# EAGLE board Task (EAGLE 8.2.1)
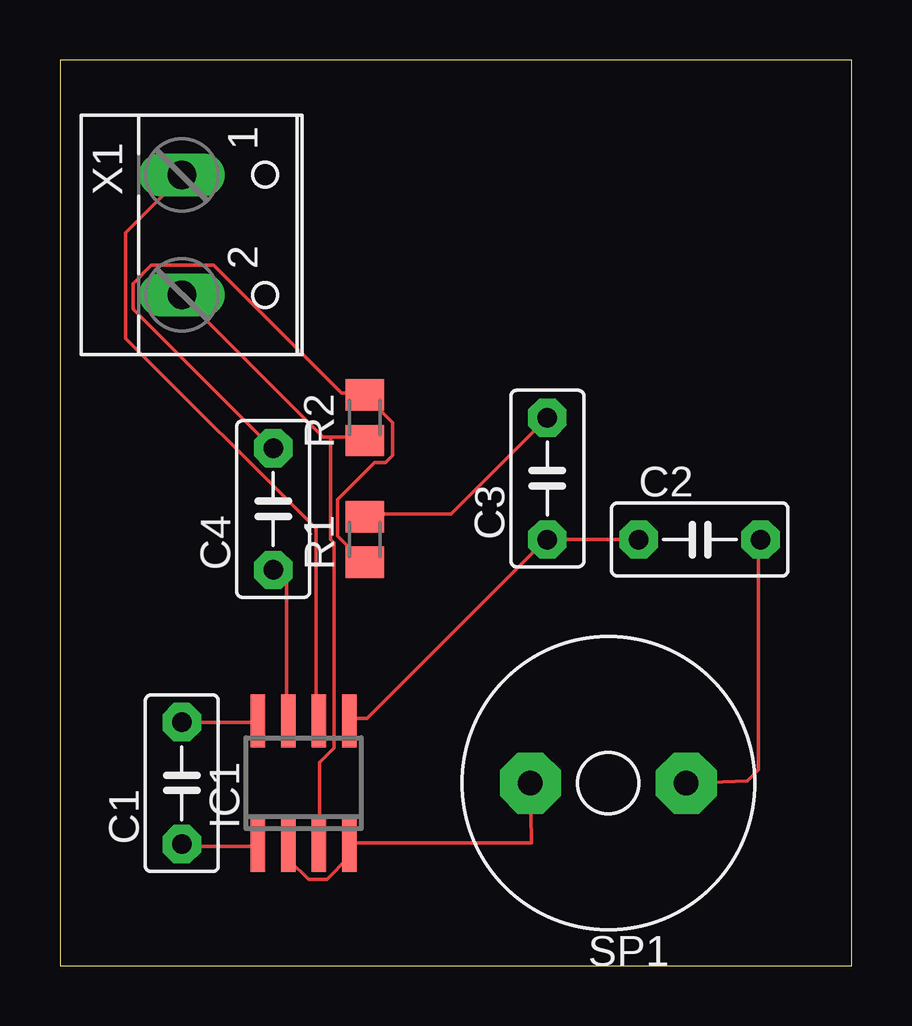
[diagram p0: board, top side]
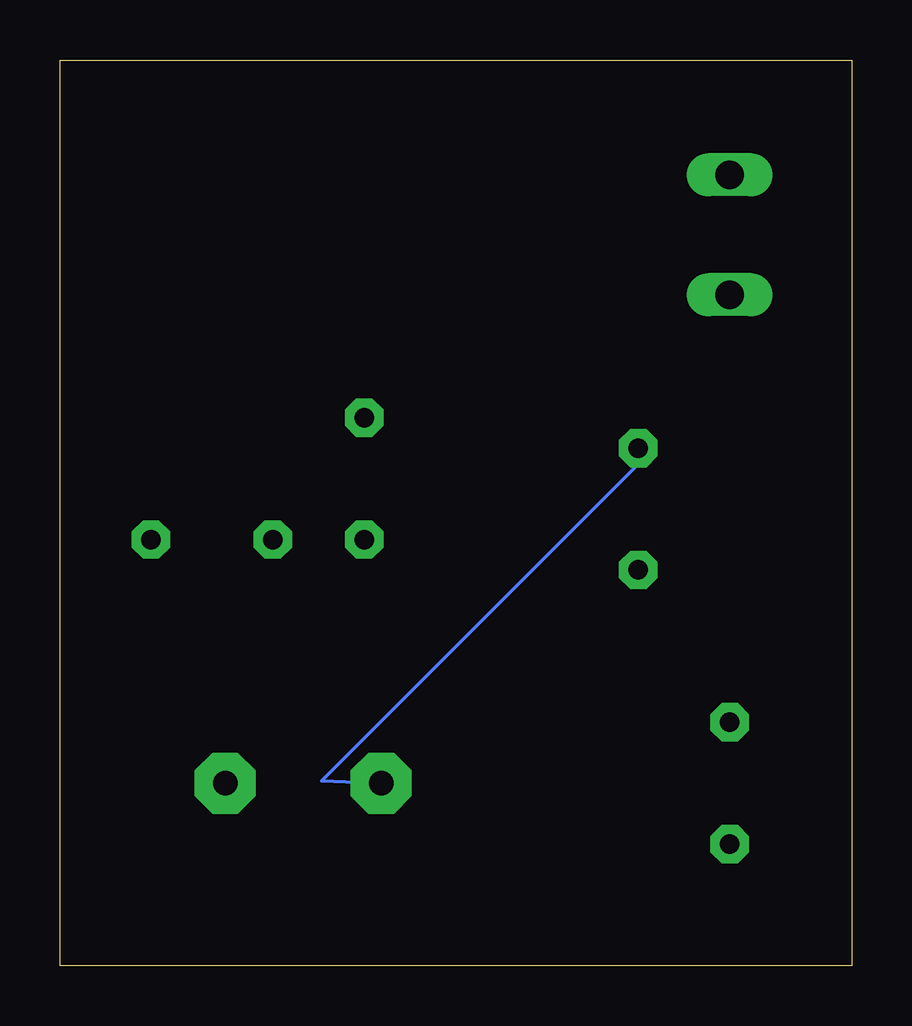
[diagram p1: board, bottom side, seen from below]

Size 33 x 37.77 mm. Coordinates in mm from the lower left corner, seen from the top.
Outline: 0,0 33,0 33,37.77 0,37.77 0,0
Copper layers (1*16): Top 0.035mm / dielectric 1.5mm / Bottom 0.035mm
Design rules "default": minimum track width 6mil, minimum drill 0.35mm, track to track 6mil, track to pad 6mil, pad to pad 6mil, via to via 6mil, smd to smd 6mil, copper to edge 40mil, drill to drill 6mil, minimum pad ring 10mil, minimum via ring 8mil, stop-mask expansion 4mil, vias tented up to drill 0mil, thermal gap 10mil

## Footprints (pad centres in the part's own frame; a part is rotated, then mirrored left to right if it is on the bottom)
C5B3 = drill 0.813 pad 1.6 octagon: 1 -2.54,0; 2 2.54,0
SO08 = smd 0.6 x 2.2: 1 -1.905,-2.6; 2 -0.635,-2.6; 3 0.635,-2.6; 4 1.905,-2.6; 5 1.905,2.6; 6 0.635,2.6; 7 -0.635,2.6; 8 -1.905,2.6
M0805 = smd 1.3 x 1.6: 1 -0.95,0; 2 0.95,0
AL60P = drill 1.016 pad 2.54 octagon: 1 -3.251,0; 2 3.251,0
W237-102 = drill 1.194 long: 1 -2.5,-1.27; 2 2.5,-1.27

## Placement (x,y rotation side)
C1  10 uF  [C5B3]  5.08,7.62 90 top
C2  250 uF  [C5B3]  26.67,17.78 0 top
C3  0.05 uF  [C5B3]  20.32,20.32 90 top
C4  [C5B3]  8.89,19.05 90 top
IC1  LM386M-1  [SO08]  10.16,7.62 0 top
R1  10  [M0805]  12.7,17.78 90 top
R2  10 k  [M0805]  12.7,22.86 90 top
SP1  AL60P  [AL60P]  22.86,7.62 180 top
X1  [W237-102]  6.35,30.48 270 top

## Library data of the parts
C1-C4 = capacitor-wima
IC1 = linear
R1 R2 = resistor
SP1 = buzzer; OC_FARNELL: unknown; OC_NEWARK: unknown
X1 = con-wago-500; MPN: 237-102; OC_FARNELL: unknown; OC_NEWARK: 70K9898

## Nets
GND: C4.2 IC1.2 IC1.4 R1.1 R2.2 SP1.2
N$1: C4.1 IC1.7
N$2: C1.1 IC1.1
N$3: C1.2 IC1.8
N$4: C2.1 C3.1 IC1.5
N$5: C3.2 R1.2
N$6: C2.2 SP1.1
N$7: IC1.6 X1.1
N$8: IC1.3 R2.1 X1.2

## Tracks (layer width: path | path; a pad name or v marks a point on that pad's centre or on a via)
GND
  Top 0.152: 9.6,4.37 9.6,4.98 IC1.2 9.6,4.37 | 12.04,5.13 IC1.4 | R1.1 12.65,16.87 11.58,17.93 11.58,19.46 13.11,20.98 13.56,20.98 13.87,21.29 13.87,22.66 12.8,23.72 R2.2 12.65,23.88 11.73,23.88 6.4,29.21 3.81,29.21 3.05,28.45 3.05,27.38 8.84,21.59 C4.2 | 9.6,4.37 10.36,3.61 11.12,3.61 12.04,4.52 12.04,4.98 IC1.4 | SP1.2 19.66,5.13 12.19,5.13 IC1.4
  Bottom 0.152: C4.2 8.99,21.59 8.99,20.83 22.1,7.72 SP1.2
N$1
  Top 0.152: C4.1 9.45,15.95 9.45,10.31 IC1.7
N$2
  Top 0.152: IC1.1 8.23,4.98 5.18,4.98 C1.1
N$3
  Top 0.152: C1.2 8.23,10.16 IC1.8
N$4
  Top 0.152: IC1.5 12.19,10.31 12.8,10.31 20.27,17.78 C3.1 C2.1
N$5
  Top 0.152: C3.2 16.31,18.85 12.8,18.85 R1.2
N$6
  Top 0.152: C2.2 29.11,17.78 29.11,8.18 28.65,7.72 SP1.1
N$7
  Top 0.152: IC1.6 10.67,10.31 10.67,18.24 2.74,26.16 2.74,30.58 5.03,32.87 X1.1
N$8
  Top 0.152: 11.28,22.05 10.97,22.05 5.18,27.84 X1.2 | 11.28,22.05 12.65,22.05 R2.1 | 11.28,22.05 11.28,17.78 11.43,17.63 11.43,9.09 10.82,8.48 10.82,5.13 IC1.3